# EAGLE board rangoon (EAGLE 7.5.0)
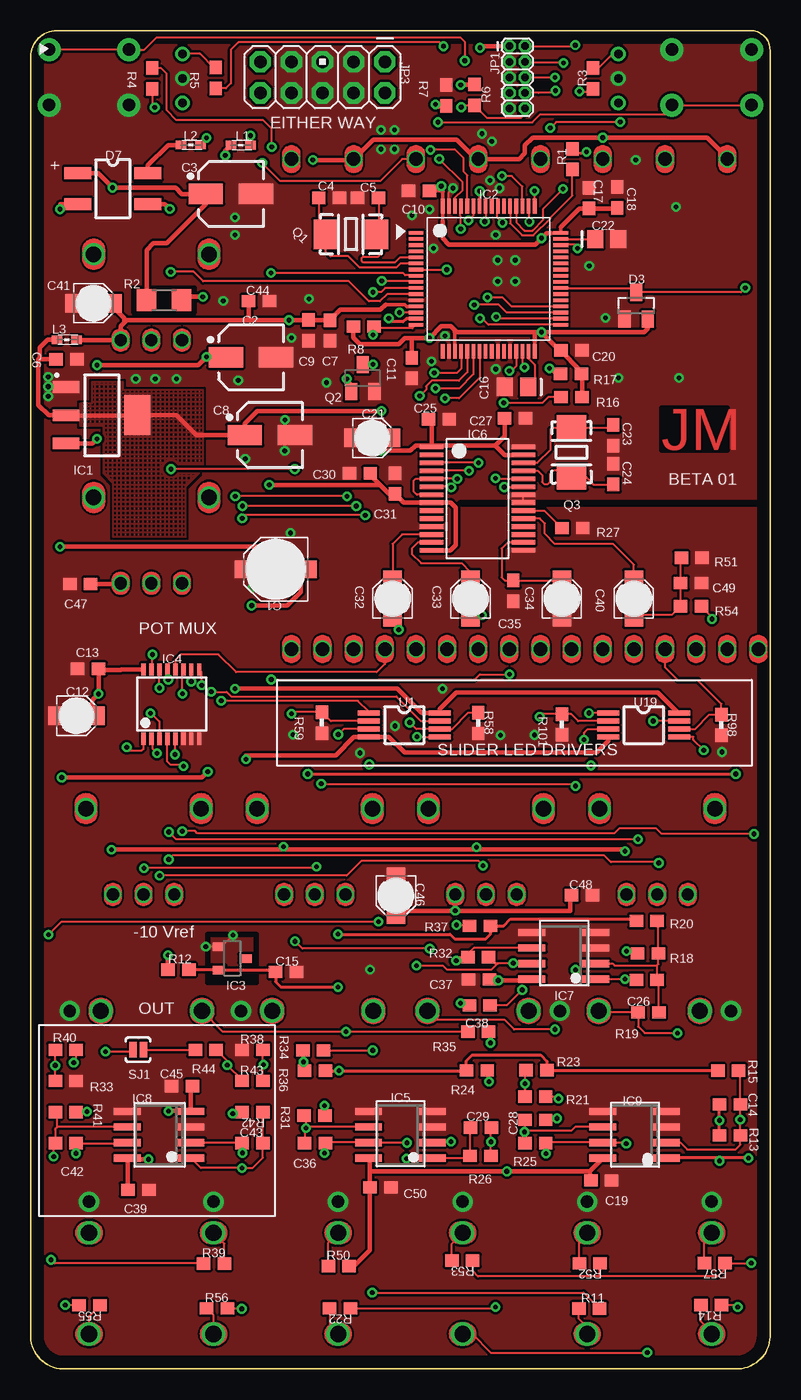
[diagram p0: board, top side]
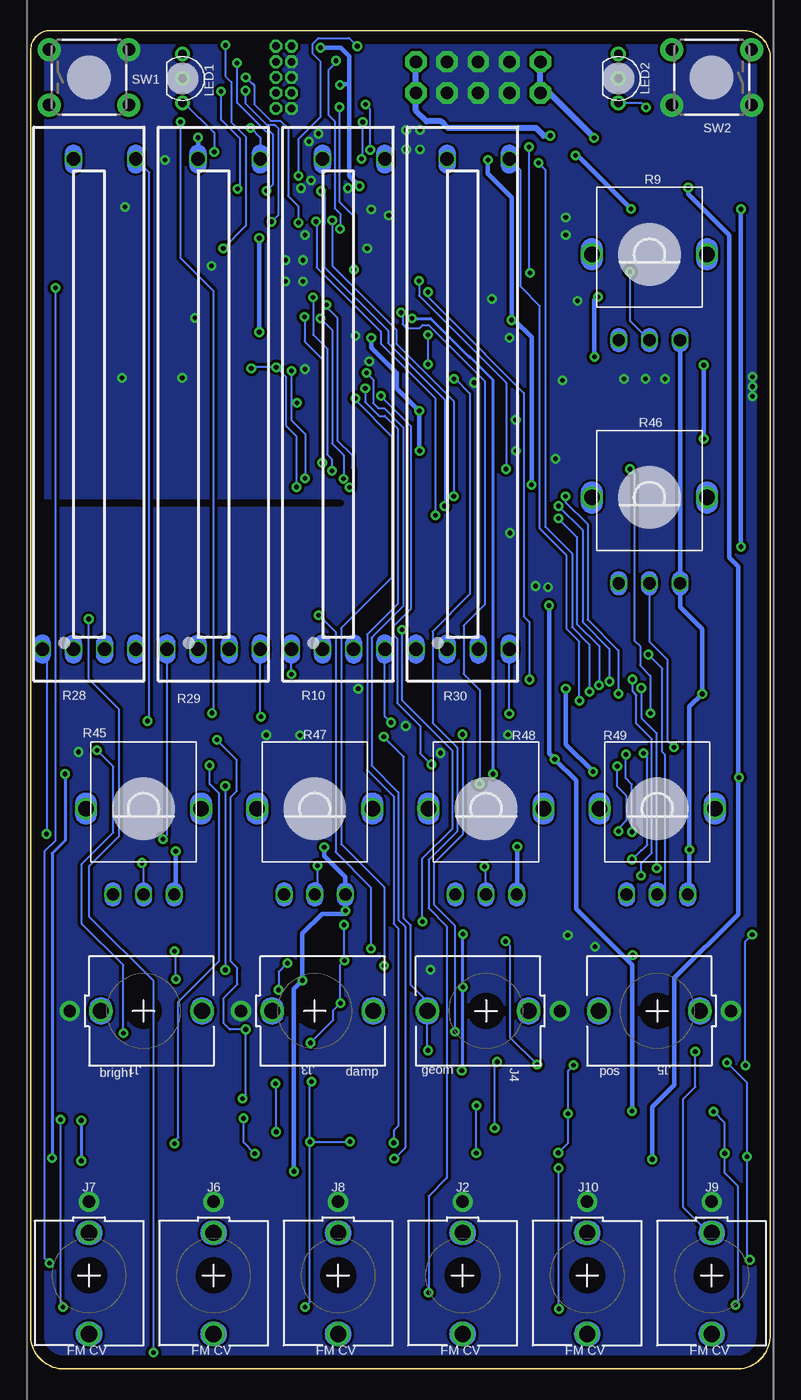
[diagram p1: board, bottom side, seen from below]

Size 60.33 x 109.22 mm. Coordinates in mm from the lower left corner, seen from the top.
Outline: 57.79,0 arc90 60.33,2.86 60.33,107.64 arc90 58.74,109.22 1.91,109.22 arc74 0,107.32 0,2.86 arc97 2.86,0 57.79,0
Copper layers (1*16): Top 0.035mm / dielectric 1.5mm / Bottom 0.035mm
Design rules "default *": minimum track width 10mil, minimum drill 0.61mm, track to track 8mil, track to pad 8mil, pad to pad 8mil, via to via 8mil, smd to smd 8mil, copper to edge 40mil, drill to drill 8mil, minimum pad ring 0mil, minimum via ring 8mil, stop-mask expansion 4mil, vias tented up to drill 15mil, thermal gap 10mil
Net classes: 0 default: width 0.178 mm, clearance 0.152 mm, clearance 0.152 mm to class 1, clearance 0.152 mm to class 2; 1 hipriority: width 0.254 mm, clearance 0.152 mm, clearance 0.152 mm to class 0, clearance 0.152 mm to class 2; 2 powa: width 0.381 mm, clearance 0.152 mm, clearance 0.152 mm to class 0, clearance 0.152 mm to class 1
tRestrict: 1 lines
bRestrict: 1 lines

## Footprints (pad centres in the part's own frame; a part is rotated, then mirrored left to right if it is on the bottom)
PANASONIC_C = smd 2.6 x 1.4: + 2.05,0; - -2.05,0
CAPAE-5.3x5.3h7 = smd 2.8 x 1.65: 1 -2.05,0; 2 2.05,0
CAP_0603 = smd 1.1 x 1: 1 -0.85,0; 2 0.85,0
CAP_0603_C5 = smd 1.1 x 1: 1 -0.85,0; 2 0.85,0
PANASONIC_A = smd 2 x 1.5: + 1.3,0; - -1.3,0
CAP_0805 = smd 1.3 x 1.5: 1 -0.95,0; 2 0.95,0
CAP_0805_C22 = smd 1.3 x 1.5: 1 -0.95,0; 2 0.95,0
SOT23 = smd 1 x 1.4: 1 -0.95,-1.1; 2 0.95,-1.1; 3 0,1.1
SOP-4/6.5x2.54 = smd 2.2 x 1: 1 -2.855,1.27; 2 -2.855,-1.27; 3 2.855,-1.27; 4 2.855,1.27
SOT223-4 = smd 2.15 x 0.95: 1 -2.9,2.3; 2 -2.9,0; 3 -2.9,-2.3 | smd 2.15 x 3.25: 4 2.9,0
TQFP-10X10-64 = smd 1.2 x 0.3: 1 -5.936,3.75; 2 -5.936,3.25; 3 -5.936,2.75; 4 -5.936,2.25; 5 -5.936,1.75; 6 -5.936,1.25; 7 -5.936,0.75; 8 -5.936,0.25; 9 -5.936,-0.25; 10 -5.936,-0.75; 11 -5.936,-1.25; 12 -5.936,-1.75; 13 -5.936,-2.25; 14 -5.936,-2.75; 15 -5.936,-3.25; 16 -5.936,-3.75; 33 5.886,-3.75; 34 5.886,-3.25; 35 5.886,-2.75; 36 5.886,-2.25; 37 5.886,-1.75; 38 5.886,-1.25; 39 5.886,-0.75; 40 5.886,-0.25; 41 5.886,0.25; 42 5.886,0.75; 43 5.886,1.25; 44 5.886,1.75; 45 5.886,2.25; 46 5.886,2.75; 47 5.886,3.25; 48 5.886,3.75 | smd 0.3 x 1.2: 17 -3.75,-5.911; 18 -3.25,-5.911; 19 -2.75,-5.911; 20 -2.25,-5.911; 21 -1.75,-5.911; 22 -1.25,-5.911; 23 -0.75,-5.911; 24 -0.25,-5.911; 25 0.25,-5.911; 26 0.75,-5.911; 27 1.25,-5.911; 28 1.75,-5.911; 29 2.25,-5.911; 30 2.75,-5.911; 31 3.25,-5.911; 32 3.75,-5.911; 49 3.75,5.936; 50 3.25,5.936; 51 2.75,5.936; 52 2.25,5.936; 53 1.75,5.936; 54 1.25,5.936; 55 0.75,5.936; 56 0.25,5.936; 57 -0.25,5.936; 58 -0.75,5.936; 59 -1.25,5.936; 60 -1.75,5.936; 61 -2.25,5.936; 62 -2.75,5.936; 63 -3.25,5.936; 64 -3.75,5.936
DBZ_R-PDSO-G3 = smd 0.7 x 1: 1 -0.95,-1.1; 2 0.95,-1.1; 3 0,1.1
TSSOP16 = smd 0.35 x 1: 1 -1.95,-2.825; 2 -1.3,-2.825; 3 -0.65,-2.825; 4 0,-2.825; 5 0.65,-2.825; 6 1.3,-2.825; 7 1.95,-2.825; 8 2.6,-2.825; 9 2.6,2.825; 10 1.95,2.825; 11 1.3,2.825; 12 0.65,2.825; 13 0,2.825; 14 -0.65,2.825; 15 -1.3,2.825; 16 -1.95,2.825
SO08 = smd 0.6 x 2.2: 1 -1.905,-2.6; 2 -0.635,-2.6; 3 0.635,-2.6; 4 1.905,-2.6; 5 1.905,2.6; 6 0.635,2.6; 7 -0.635,2.6; 8 -1.905,2.6
SSOP28 = smd 0.381 x 1.905: 1 -4.55,-3.752; 2 -3.9,-3.752; 3 -3.25,-3.752; 4 -2.6,-3.752; 5 -1.95,-3.752; 6 -1.3,-3.752; 7 -0.65,-3.752; 8 0,-3.752; 9 0.65,-3.752; 10 1.3,-3.752; 11 1.95,-3.752; 12 2.6,-3.752; 13 3.25,-3.752; 14 3.9,-3.752; 15 3.9,3.752; 16 3.25,3.752; 17 2.6,3.752; 18 1.95,3.752; 19 1.3,3.752; 20 0.65,3.752; 21 0,3.752; 22 -0.65,3.752; 23 -1.3,3.752; 24 -1.95,3.752; 25 -2.6,3.752; 26 -3.25,3.752; 27 -3.9,3.752; 28 -4.55,3.752
SO08_IC7 = smd 0.6 x 2.2: 1 -1.905,-2.6; 2 -0.635,-2.6; 3 0.635,-2.6; 4 1.905,-2.6; 5 1.905,2.6; 6 0.635,2.6; 7 -0.635,2.6; 8 -1.905,2.6
SO08_IC8 = smd 0.6 x 2.2: 1 -1.905,-2.6; 2 -0.635,-2.6; 3 0.635,-2.6; 4 1.905,-2.6; 5 1.905,2.6; 6 0.635,2.6; 7 -0.635,2.6; 8 -1.905,2.6
Thonkiconn = drill 1.321 pad 1.905: 1 0,3.48; 2 0,-4.775 | drill 1.016 pad 1.651: 3 0,6.02
Thonkiconn_J2 = drill 1.321 pad 1.905: 1 0,3.48; 2 0,-4.775 | drill 1.016 pad 1.651: 3 0,6.02
Thonkiconn_J3 = drill 1.321 pad 1.905: 1 0,3.48; 2 0,-4.775 | drill 1.016 pad 1.651: 3 0,6.02
Thonkiconn_J4 = drill 1.321 pad 1.905: 1 0,3.48; 2 0,-4.775 | drill 1.016 pad 1.651: 3 0,6.02
Thonkiconn_J5 = drill 1.321 pad 1.905: 1 0,3.48; 2 0,-4.775 | drill 1.016 pad 1.651: 3 0,6.02
2X5-1.27 = drill 0.61 pad 1.033 octagon: 1 -1.27,3.81; 2 0,3.81; 3 -1.27,2.54; 4 0,2.54; 5 -1.27,1.27; 6 0,1.27; 7 -1.27,0; 8 0,0; 9 -1.27,-1.27; 10 0,-1.27
AVR_ICSP = drill 1.016 pad 1.737 octagon: 1 -1.27,5.08; 2 1.27,5.08; 3 -1.27,2.54; 4 1.27,2.54; 5 -1.27,0; 6 1.27,0; 7 -1.27,-2.54; 8 1.27,-2.54; 9 -1.27,-5.08; 10 1.27,-5.08
0603 = smd 0.85 x 0.7: 1 -0.9,0; 2 0.7,0
LED-BICOLOR-THROUGHHOLE = drill 0.7 pad 1.208: 1 -2,0; 2 0,0; 3 2,0
TSC_7A_crystal = smd 2 x 2.4: 1 2.036,0; 2 -2.035,0
SOT23-BEC = smd 1 x 1.4: B -0.95,-1.1; C 0,1.1; E 0.95,-1.1
TSC_7A_crystal_Q3 = smd 2 x 2.4: 1 2.036,0; 2 -2.035,0
RES_0603 = smd 1.1 x 1: 1 -0.85,0; 2 0.85,0
R1206 = smd 1.6 x 1.803: 1 -1.422,0; 2 1.422,0
ALPS_POT_VERTICAL_PS = drill 1 pad 1.372: P$1 -2.5,7; P$2 0,7; P$3 2.5,7 | drill 1.27 pad 1.778: P$4 -4.7,0; P$5 4.7,0
BOURNS_PTL_30mm = drill 1.092 pad 1.397: 1 -20,1.27; 2 -20,3.81; 3 20,1.27; 4 -20,-1.27; 5 20,-3.81; 6 -20,-3.81
BOURNS_PTL_30mm_R28 = drill 1.092 pad 1.397: 1 -20,1.27; 2 -20,3.81; 3 20,1.27; 4 -20,-1.27; 5 20,-3.81; 6 -20,-3.81
BOURNS_PTL_30mm_R30 = drill 1.092 pad 1.397: 1 -20,1.27; 2 -20,3.81; 3 20,1.27; 4 -20,-1.27; 5 20,-3.81; 6 -20,-3.81
ALPS_POT_VERTICAL_PS_R45 = drill 1 pad 1.372: P$1 -2.5,7; P$2 0,7; P$3 2.5,7 | drill 1.27 pad 1.778: P$4 -4.7,0; P$5 4.7,0
ALPS_POT_VERTICAL_PS_R48 = drill 1 pad 1.372: P$1 -2.5,7; P$2 0,7; P$3 2.5,7 | drill 1.27 pad 1.778: P$4 -4.7,0; P$5 4.7,0
ALPS_POT_VERTICAL_PS_R49 = drill 1 pad 1.372: P$1 -2.5,7; P$2 0,7; P$3 2.5,7 | drill 1.27 pad 1.778: P$4 -4.7,0; P$5 4.7,0
RES_0603_R58 = smd 1.1 x 1: 1 -0.85,0; 2 0.85,0
SJ_2S-NOTRACE = smd 0.635 x 1.27: 1 -0.45,0; 2 0.4,0
TACTILE-PTH = drill 1.016 pad 1.88: 1 -3.251,2.261; 2 3.251,2.261; 3 -3.251,-2.261; 4 3.251,-2.261
TACTILE-PTH_SW2 = drill 1.016 pad 1.88: 1 -3.251,2.261; 2 3.251,2.261; 3 -3.251,-2.261; 4 3.251,-2.261
TSSOP-8 = smd 1.8 x 0.4: 1 -2.9,0.975; 2 -2.9,0.325; 3 -2.9,-0.325; 4 -2.9,-0.975; 5 2.9,-0.975; 6 2.9,-0.325; 7 2.9,0.325; 8 2.9,0.975

## Placement (x,y rotation side)
C1  22u  [PANASONIC_C]  20.01,65.26 180 top
C2  47u  [CAPAE-5.3x5.3h7]  17.98,82.55 0 top
C3  47u  [CAPAE-5.3x5.3h7]  16.34,95.89 0 top
C4  18p  [CAP_0603]  24.36,95.56 180 top
C5  18p  [CAP_0603_C5]  27.53,95.56 0 top
C6  100n  [CAP_0603_C5]  2.92,82.39 0 top
C7  1u  [CAP_0603_C5]  24.43,84.74 270 top
C8  47u  [CAPAE-5.3x5.3h7]  19.52,76.2 0 top
C9  100n  [CAP_0603_C5]  22.66,84.75 270 top
C10  100n  [CAP_0603_C5]  31.68,96.14 180 top
C11  100n  [CAP_0603_C5]  31.09,81.68 270 top
C12  10u  [PANASONIC_A]  3.73,53.31 0 top
C13  100n  [CAP_0603_C5]  4.69,57.14 180 top
C14  2.2n  [CAP_0603_C5]  57.05,21.59 180 top
C15  100n  [CAP_0603_C5]  20.83,32.4 0 top
C16  2.2u  [CAP_0805]  39.64,80.14 180 top
C17  100n  [CAP_0603_C5]  45.55,95.55 90 top
C18  1u  [CAP_0603]  47.87,95.6 90 top
C19  100n  [CAP_0603_C5]  46.55,15.38 0 top
C20  100n  [CAP_0603_C5]  44.12,83.12 0 top
C21  10u  [PANASONIC_A]  27.87,75.98 0 top
C22  2.2u  [CAP_0805_C22]  47,92.2 0 top
C23  18p  [CAP_0603]  47.53,76.2 90 top
C24  18p  [CAP_0603_C5]  47.53,73.03 270 top
C25  100n  [CAP_0603_C5]  33.3,77.49 0 top
C26  10n  [CAP_0603_C5]  50.27,31.75 180 top
C27  100n  [CAP_0603_C5]  39.51,77.59 0 top
C28  10n  [CAP_0603_C5]  41.18,20.32 0 top
C29  2.2n  [CAP_0603]  36.73,19.69 180 top
C30  1u  [CAP_0603_C5]  26.86,73.1 180 top
C31  100n  [CAP_0603_C5]  29.73,72.26 90 top
C32  10u  [PANASONIC_A]  29.53,62.87 90 top
C33  10u  [PANASONIC_A]  35.88,62.87 90 top
C34  10u  [PANASONIC_A]  43.34,62.87 90 top
C35  100n  [CAP_0603_C5]  39.37,63.5 270 top
C36  10n  [CAP_0603_C5]  23.19,18.42 0 top
C37  100n  [CAP_0603_C5]  36.58,31.79 180 top
C38  10n  [CAP_0603_C5]  36.64,29.67 0 top
C39  100n  [CAP_0603_C5]  8.79,14.61 0 top
C40  10u  [PANASONIC_A]  49.22,62.87 90 top
C41  10u  [PANASONIC_A]  5.13,86.97 0 top
C42  18p  [CAP_0603_C5]  2.86,18.42 0 top
C43  18p  [CAP_0603_C5]  18.1,18.42 0 top
C44  100n  [CAP_0603_C5]  18.64,87.15 0 top
C45  100n  [CAP_0603_C5]  12.35,23.07 0 top
C46  10u  [PANASONIC_A]  29.8,38.62 270 top
C47  100n  [CAP_0603_C5]  4.05,64.06 180 top
C48  100n  [CAP_0603_C5]  44.98,38.66 0 top
C49  220p  [CAP_0603_C5]  53.88,64.14 0 top
C50  100n  [CAP_0603_C5]  28.54,14.83 0 top
D3  BAT54S  [SOT23]  49.4,86.76 0 top
D7  MB1S  [SOP-4/6.5x2.54]  6.71,96.32 0 top
IC1  LM1117-3.3  [SOT223-4]  5.8,77.83 0 top
IC2  STM32F405RGT6  [TQFP-10X10-64]  37.37,88.96 0 top
IC3  LM4040B10  [DBZ_R-PDSO-G3]  16.44,33.5 270 top
IC4  4051PW  [TSSOP16]  11.16,54.26 0 top
IC5  MCP6002  [SO08]  30.17,19.11 90 top
IC6  WM8731  [SSOP28]  36.46,70.7 270 top
IC7  MCP6002  [SO08_IC7]  43.5,33.72 90 top
IC8  TL072  [SO08_IC8]  10.48,19.11 90 top
IC9  MCP6002  [SO08]  49.28,19.11 90 top
J1  PJ301_THONKICONN6  [Thonkiconn]  51.12,29.21 90 bottom
J2  PJ301_THONKICONN6  [Thonkiconn_J2]  25.09,7.62 0 bottom
J3  PJ301_THONKICONN6  [Thonkiconn_J3]  37.15,29.21 90 bottom
J4  PJ301_THONKICONN6  [Thonkiconn_J4]  23.18,29.21 270 bottom
J5  PJ301_THONKICONN6  [Thonkiconn_J5]  9.21,29.21 270 bottom
J6  PJ301_THONKICONN6  [Thonkiconn_J2]  45.41,7.62 0 bottom
J7  PJ301_THONKICONN6  [Thonkiconn_J2]  55.57,7.62 0 bottom
J8  PJ301_THONKICONN6  [Thonkiconn_J2]  35.25,7.62 0 bottom
J9  PJ301_THONKICONN6  [Thonkiconn_J2]  4.77,7.62 0 bottom
J10  PJ301_THONKICONN6  [Thonkiconn_J2]  14.93,7.62 0 bottom
JP1  M05X2MINIJTAG  [2X5-1.27]  40.33,104.14 0 top
JP3  M05X2PTH  [AVR_ICSP]  23.82,105.41 270 top
L1  WE-CBF_0603  [0603]  17.24,99.87 0 top
L2  WE-CBF_0603  [0603]  13.17,99.89 0 top
L3  WE-CBF_0603  [0603]  3.05,84 0 top
LED1  WP115VEGW  [LED-BICOLOR-THROUGHHOLE]  47.95,105.32 270 bottom
LED2  WP115VEGW  [LED-BICOLOR-THROUGHHOLE]  12.39,105.32 270 bottom
Q1  8MHz  [TSC_7A_crystal]  26.13,92.6 180 top
Q2  MMBT3904  [SOT23-BEC]  27.1,80.85 0 top
Q3  12.288MHz  [TSC_7A_crystal_Q3]  44.14,74.8 90 top
R1  180  [RES_0603]  44.2,98.73 90 top
R2  4.7  [R1206]  10.89,87.23 180 top
R3  180  [RES_0603]  45.88,105.31 90 top
R4  180  [RES_0603]  9.93,105.31 270 top
R5  180  [RES_0603]  15.1,105.35 90 top
R6  10k  [RES_0603]  36.22,103.97 90 top
R7  10k  [RES_0603]  33.9,103.92 270 top
R8  10k  [RES_0603]  27.18,85.06 180 top
R9  10kB  [ALPS_POT_VERTICAL_PS]  9.85,90.97 180 bottom
R10  BOURNS PTL LED SLIDE POT  [BOURNS_PTL_30mm]  35.25,78.74 90 bottom
R11  100k  [RES_0603]  45.57,4.91 0 top
R12  2.2k  [RES_0603]  12.06,32.59 0 top
R13  47k  [RES_0603]  57.05,19.05 0 top
R14  100k  [RES_0603]  55.53,5.2 180 top
R15  180k  [RES_0603]  56.92,24.33 180 top
R16  2.2k  [RES_0603]  44.13,79.31 0 top
R17  2.2k  [RES_0603]  44.08,81.2 0 top
R18  20k  [RES_0603]  50.36,33.92 0 top
R19  100k  [RES_0603]  50.41,29.1 180 top
R20  120k  [RES_0603]  50.26,36.57 180 top
R21  100k  [RES_0603]  41.18,22.23 0 top
R22  100k  [RES_0603]  25.23,4.94 180 top
R23  120k  [RES_0603]  41.27,24.38 0 top
R24  120k  [RES_0603]  36.4,24.37 180 top
R25  20k  [RES_0603]  41.18,18.42 180 top
R26  20k  [RES_0603]  36.7,17.39 0 top
R27  36k  [RES_0603]  44.19,68.62 0 top
R28  BOURNS PTL LED SLIDE POT  [BOURNS_PTL_30mm_R28]  55.57,78.74 90 bottom
R29  BOURNS PTL LED SLIDE POT  [BOURNS_PTL_30mm]  45.41,78.74 90 bottom
R30  BOURNS PTL LED SLIDE POT  [BOURNS_PTL_30mm_R30]  25.09,78.74 90 bottom
R31  20k  [RES_0603]  23.17,20.66 180 top
R32  20k  [RES_0603]  36.52,33.61 180 top
R33  47k  [RES_0603]  2.86,23.5 180 top
R34  100k  [RES_0603]  23.06,26 0 top
R35  100k  [RES_0603]  36.52,27.52 180 top
R36  120k  [RES_0603]  23.2,24.34 0 top
R37  120k  [RES_0603]  36.67,36.16 0 top
R38  47k  [RES_0603]  18.1,26.04 0 top
R39  47k  [RES_0603]  14.96,8.6 0 top
R40  6.8k  [RES_0603]  2.86,26.04 180 top
R41  47k  [RES_0603]  2.86,20.96 180 top
R42  47k  [RES_0603]  18.1,20.96 180 top
R43  6.8k  [RES_0603]  18.1,23.5 0 top
R44  47k  [RES_0603]  14.29,26.04 180 top
R45  10kB  [ALPS_POT_VERTICAL_PS_R45]  51.12,45.72 180 bottom
R46  10kB  [ALPS_POT_VERTICAL_PS]  9.85,71.12 180 bottom
R47  10kB  [ALPS_POT_VERTICAL_PS]  37.15,45.72 180 bottom
R48  10kB  [ALPS_POT_VERTICAL_PS_R48]  23.18,45.72 180 bottom
R49  10kB  [ALPS_POT_VERTICAL_PS_R49]  9.21,45.72 180 bottom
R50  3.3M  [RES_0603]  25.14,8.4 0 top
R51  6.8k  [RES_0603]  53.94,66.2 180 top
R52  100k  [RES_0603]  45.61,8.61 180 top
R53  1M  [RES_0603]  35.21,8.84 180 top
R54  36k  [RES_0603]  53.88,62.23 0 top
R55  1.0k  [RES_0603]  4.8,5.19 180 top
R56  1.0k  [RES_0603]  15.2,4.95 0 top
R57  470k  [RES_0603]  55.81,8.63 180 top
R58  1.0k  [RES_0603_R58]  36.52,52.71 270 top
R59  1.0k  [RES_0603_R58]  23.76,52.75 270 top
R98  1.0k  [RES_0603_R58]  56.36,52.55 270 top
R101  1.0k  [RES_0603_R58]  43.34,52.59 270 top
SJ1  SOLDERJUMPERNC2  [SJ_2S-NOTRACE]  8.76,26.04 180 top
SW1  TAC_SWITCHPTH  [TACTILE-PTH]  55.57,105.41 0 bottom
SW2  TAC_SWITCHPTH  [TACTILE-PTH_SW2]  4.77,105.41 180 bottom
U1  TLV2172  [TSSOP-8]  30.48,52.55 0 top
U19  TLV2172  [TSSOP-8]  50.01,52.55 0 top

## Library data of the parts
C1-C50 D3 D7 IC1-IC9 J1-J10 JP1 JP3 L1-L3 LED1 LED2 Q1-Q3 R1-R9 R11-R27 R31-R59 R98 R101 SJ1 SW1 SW2 = common
R10 R28-R30 = common; DATASHEET: http://www.bourns.com/data/global/pdfs/bourns_trimpot_catalog.pdf; MANUFACTURER: Bourns
U1 U19 = common; DATASHEET: http://datasheets.diptrace.com\ti\TL07x.pdf

## Nets
+3V3 [powa]: C6.1 C8.1 C10.1 C11.1 C17.1 C18.1 C20.1 C21.+ C25.1 C27.1 D3.2 IC1.2 IC1.4 IC2.19 IC2.32 IC2.48 IC2.64 IC6.1 IC6.27 JP1.1 L3.1 R6.2 R8.2 R16.2 R17.2
+3V3_A [powa]: C7.1 C9.1 C12.+ C13.1 C19.1 C30.1 C31.1 C37.1 C41.+ C44.1 C46.+ C47.1 C48.1 C50.1 IC2.13 IC4.16 IC5.8 IC6.8 IC6.14 IC7.8 IC9.8 L3.2 R9.P$1 R10.3 R28.3 R29.3 R30.3 R45.P$1 R46.P$1 R47.P$1 R48.P$1 R49.P$1 R50.2
AREF_-10 [hipriority]: C15.1 IC3.2 R12.2 R15.2 R20.2 R23.2 R24.2 R36.2 R37.2
AUX_OUT: C33.+ IC6.13
BOOT_FLASH: IC2.60 R7.2
BRI-raw: J1.2 R19.2 U19.5
BRIGHTNESS_ATT: IC4.2 R45.P$2
BRIGHTNESS_CV: C26.2 IC2.14 IC7.1 R18.1
BRIGHTNESS_POT: IC4.4 R28.2
CV_NORMALIZATION: J7.1 R57.2
DAMP-raw: J3.2 R21.2 U19.3
DAMP_ATT: IC4.13 R47.P$2
DAMP_CV: C28.2 IC2.21 IC9.7 R25.1
DAMP_POT: IC4.5 R29.2
FM_CV: C29.2 IC2.20 IC5.1 R26.1
FREQUENCY_ATT: IC4.1 R46.P$2
FREQUENCY_POT: IC2.11 R9.P$2
GEOM-raw: J4.2 R34.2 U1.5
GEOMETRY_ATT: IC4.14 R48.P$2
GEOMETRY_CV: C36.2 IC2.22 IC5.7 R31.1
GEOMETRY_POT: IC2.10 R10.2
GND: C1.+ C2.2 C3.2 C4.1 C5.1 C6.2 C7.2 C8.2 C9.2 C10.2 C11.2 C12.- C13.2 C15.2 C16.2 C17.2 C18.2 C19.2 C20.2 C21.- C22.2 C23.1 C24.1 C25.2 C27.2 C30.2 C31.2 C34.- C35.2 C37.2 C39.2 C41.- C44.2 C45.1 C46.- C47.2 C48.2 C49.2 C50.2 D3.1 IC1.1 IC2.12 IC2.18 IC2.26 IC2.28 IC2.63 IC3.1 IC4.6 IC4.7 IC4.8 IC5.3 IC5.4 IC5.5 IC6.11 IC6.15 IC6.21 IC6.22 IC6.28 IC7.3 IC7.4 IC7.5 IC8.3 IC8.5 IC9.3 IC9.4 IC9.5 J1.3 J2.3 J3.3 J4.3 J5.3 J6.3 J7.3 J8.3 J9.3 J10.3 JP1.3 JP1.5 JP1.9 JP3.3 JP3.4 JP3.5 JP3.6 JP3.7 JP3.8 LED1.2 LED2.2 Q2.E R7.1 R9.P$3 R9.P$4 R9.P$5 R10.1 R27.2 R28.1 R29.1 R30.1 R33.1 R38.1 R45.P$3 R45.P$4 R45.P$5 R46.P$3 R46.P$4 R46.P$5 R47.P$3 R47.P$4 R47.P$5 R48.P$3 R48.P$4 R48.P$5 R49.P$3 R49.P$4 R49.P$5 R51.1 R58.2 R59.2 R98.2 R101.2 SW1.1 SW1.2 SW2.1 SW2.2
I2C_SCL: IC2.29 IC6.24 R16.1
I2C_SDA: IC2.30 IC6.23 R17.1
I2S_LRCK: IC2.33 IC6.5 IC6.7
I2S_SCK: IC2.34 IC6.3
I2S_SIN: IC2.35 IC6.6
I2S_SOUT: IC2.36 IC6.4
IN_1: IC6.20 R27.1
IN_2: C40.+ IC6.19
JTCK: IC2.49 JP1.4
JTDI: IC2.50 JP1.8
JTDO: IC2.55 JP1.6
JTMS: IC2.46 JP1.2
MAIN_OUT: C32.+ IC6.12
MUX_ADDR_0: IC2.59 IC4.11
MUX_ADDR_1: IC2.58 IC4.10
MUX_ADDR_2: IC2.57 IC4.9
MUXED_POTS: IC2.9 IC4.3
N$2: C26.1 IC7.2 R18.2 R19.1 R20.1
N$3: J7.2 R14.2
N$4: J2.2 R22.2
N$5: C29.1 IC5.2 R22.1 R24.1 R26.2
N$7: C5.2 IC2.5 Q1.2
N$8: C4.2 IC2.6 Q1.1
N$9: J6.2 R11.1
N$11: C28.1 IC9.6 R21.1 R23.1 R25.2
N$12: LED1.3 R1.2
N$13: C22.1 IC2.47
N$14: C14.1 IC9.2 R13.2 R14.1 R15.1
N$15: C36.1 IC5.6 R31.2 R34.1 R36.1
N$16 [powa]: C2.1 IC1.3 R2.1
N$17: C34.+ C35.1 IC6.16
N$18: C40.- C49.1 R51.2 R54.1
N$19: C16.1 IC2.31
N$20: J6.1 R52.2
N$21: J8.2 R54.2
N$22: LED1.1 R3.2
N$23: C33.- R38.2 R43.2
N$25: C43.1 IC8.2 R42.2 R43.1 R44.1
N$27: LED2.3 R4.2
N$28: C43.2 IC8.1 R42.1 R56.2
N$29: J10.2 R56.1
N$30: C38.1 IC7.6 R32.2 R35.1 R37.1
N$31: C32.- R33.2 R40.2
N$32: C42.1 IC8.6 R39.1 R40.1 R41.2
N$33: C42.2 IC8.7 R41.1 R55.2
N$34: J9.2 R55.1
N$35: LED2.1 R5.2
N$37: IC2.52 R3.1
N$38: J2.1 R50.1
N$39: J8.1 R53.2
N$40: IC2.8 R4.1
N$41: C24.2 IC6.25 Q3.2
N$42: C23.2 IC6.26 Q3.1
N$43: IC2.53 R1.1
N$44: IC2.51 R5.1
N$45: J10.1 R39.2
N$46: R44.2 SJ1.1
N$47: J9.1 SJ1.2
N$56: JP3.1 JP3.2 L1.2
N$64: JP3.9 JP3.10 L2.2
N$66: Q2.B R11.2
Net_0: R30.6 R59.1 U1.2
Net_1: R10.6 R58.1 U1.6
Net_95 [powa]: D7.3 L1.1
Net_96 [powa]: D7.4 L2.1
Net_103: R30.5 U1.1
Net_104: R29.5 U19.1
Net_105: R28.5 U19.7
Net_106: R10.5 U1.7
Net_109: R29.6 R101.1 U19.2
Net_116: R28.6 R98.1 U19.6
NORMALIZATION_PROBE: D3.3 IC2.39 R52.1 R53.1 R57.1
POS-raw: J5.2 R35.2 U1.3
POSITION_ATT: IC4.15 R49.P$2
POSITION_CV: C38.2 IC2.23 IC7.7 R32.1
POSITION_POT: IC4.12 R30.2
RESET: IC2.7 JP1.10 R6.1
STRUM: IC2.16 Q2.C R8.1
SW_MODE: IC2.61 SW2.3 SW2.4
SW_POLYPHONY: IC2.62 SW1.3 SW1.4
V_OCT_CV [hipriority]: C14.2 IC2.15 IC9.1 R13.1
VCC [powa]: C3.1 C39.1 D7.1 IC8.8 R2.2 U1.8 U19.8
VEE [powa]: C1.- C45.2 D7.2 IC8.4 R12.1 U1.4 U19.4

## Tracks (layer width: path | path; a pad name or v marks a point on that pad's centre or on a via)
+3V3  (via drill 0.38 pad 0.7)
  Top 0.3: IC2.32 41.12,83.84 | 34.62,84.62 IC2.19 | 42.47,92.71 IC2.48 43.26,93.19 | 33.62,93.67 IC2.64 33.62,96.08
  Top 0.381: IC1.4 11.86,77.83 13.49,76.2 C8.1 17.47,77.16 18.48,78.18 v28.62,78.18 | IC1.2 2.9,77.79 | 2.9,77.79 8.7,77.79 | 8.7,77.79 IC1.4 | 41.12,83.84 41.12,84.62 | 41.12,84.62 34.77,84.62 | 34.77,84.62 34.62,84.62 | 42.47,92.71 42.1,92.71 v41.67,92.29 41.15,91.76 34.13,91.76 33.62,92.27 33.62,93.67 | 33.62,96.08 33.5,96.21 | 33.5,96.21 v33.5,96.52 | v36.67,107.83 36.8,107.95 JP1.1 | 41.12,84.62 v41.67,84.62 | 34.77,84.62 34.29,85.09 33.5,85.09 v32.55,84.14 31.14,84.14 | 31.14,84.14 30.53,84.14 30.02,83.63 26.87,83.63 26.33,84.17 R8.2 | IC6.27 38.67,74.6 37.9,75.37 | 37.9,75.37 32.83,75.37 IC6.1 | IC6.1 32.71,75.36 31.4,75.36 30.96,74.93 v28.58,74.93 28.58,75.57 29.58,75.57 C21.+ | IC6.1 32.71,77.24 C25.1 | C27.1 38.66,76.13 37.9,75.37 | R16.2 44.98,81.14 R17.2 44.93,81.4 44.04,82.29 44.04,82.34 C20.1 43.17,83.12 v41.67,84.62 | 43.26,93.19 44.77,94.7 C17.1 47.81,94.7 C18.1 | C11.1 31.09,84.09 31.14,84.14 | L3.1 1.38,84 0.74,83.35 0.74,82.39 | 0.74,82.39 0.64,82.39 0.64,78.66 1.47,77.83 IC1.2 | v41.67,84.62 50.07,84.62 50.35,84.9 D3.2 | IC1.2 2.9,77.79 | 2.9,77.79 8.7,77.79 | 8.7,77.79 IC1.4 | C10.1 33.5,96.21 | R6.2 35.12,104.82 v35.09,104.78 | C6.1 0.74,82.39
  Bottom 0.381: v33.5,96.52 34.34,97.36 34.34,104.83 | 34.34,104.83 34.34,107.13 35.04,107.83 v36.67,107.83 | v41.67,84.62 v41.67,92.29 | v28.58,74.93 28.62,74.93 v28.62,78.18 30.46,80.01 30.46,81.27 32.55,83.36 v32.55,84.14 | v35.09,104.78 35.04,104.83 34.34,104.83
  pour Top (isolate 0.178, hatched): 4.06,78.81 5.01,78.81 5.01,80.56 7.53,80.56 7.53,79.92 14.04,79.92 14.04,73.38 12.61,71.95 12.61,67.88 6.76,67.88 6.76,72.27 5.97,73.06 5.97,76.93 4.06,76.93
+3V3_A  (via drill 0.38 pad 0.7)
  Top 0.3: IC2.13 30.68,86.71 30.52,86.87 28.96,86.87
  Top 0.35: IC4.16 8.84,57.09
  Top 0.381: R28.3 56.84,98.87 55.22,100.48 v46.68,100.48 40.95,100.48 40.33,99.86 40.33,99.22 39.85,98.74 R10.3 36.36,98.74 34.77,100.33 27.94,100.33 R30.3 26.28,98.66 v23.02,98.66 | 28.96,86.87 28.52,86.44 25.28,86.44 C7.1 22.67,85.59 C9.1 v21.09,85.6 17.81,85.6 | 17.81,85.6 7.85,85.6 7.63,85.38 | 7.63,85.38 7.63,85.77 C41.+ | IC6.14 34.25,66.8 34.66,67.22 34.66,70.3 34.26,70.7 IC6.8 30.44,70.7 C31.1 29.27,71.41 28.52,72.15 | 8.84,57.09 7.4,57.09 7.35,57.04 5.64,57.04 C13.1 v5.54,55.09 5.03,54.58 C12.+ | 17.81,85.6 17.81,87.12 C44.1 | 28.52,72.15 27.71,72.96 C30.1 | 27.69,16.12 C50.1 27.69,9.68 26.41,8.4 R50.2 | 27.69,16.12 27.69,17.09 IC5.8 | 27.69,16.12 v38.85,16.12 45.63,16.12 | 45.63,16.12 46.68,17.17 IC9.8 | C48.1 44.03,38.56 44.03,37.4 v34.64,37.4 29.87,37.4 C46.+ | C19.1 45.63,16.12 | IC7.8 41.01,31.7 v38.15,31.7 37.51,31.7 C37.1 | v48.5,42.25 48.37,42.38 36.38,42.38 | 36.38,42.38 20.69,42.38 | 20.69,42.38 v6.58,42.38 | C47.1 7.28,64.06 R46.P$1 | L3.2 3.78,83.97 R9.P$1 7.35,85.09 7.63,85.38 | v20.63,42.62 20.69,42.62 20.69,42.38 | v36.38,42.59 36.38,42.38 | v19.46,72.15 28.52,72.15
  Bottom 0.381: R29.3 v46.68,100.48 | v23.02,98.66 23.02,97.54 21.09,95.6 v21.09,85.6 20.87,85.6 19.46,84.19 v19.46,72.15 | v38.85,16.12 38.85,31 v38.15,31.7 38.15,35.53 36.54,37.14 34.64,37.14 v34.64,37.4 34.64,38.71 R47.P$1 34.65,40.13 36.38,41.86 v36.38,42.59 | R45.P$1 48.5,38.72 v48.5,42.25 | R49.P$1 6.58,38.85 v6.58,42.38 6.58,54.05 v5.54,55.09 5.54,60.39 7.35,62.19 R46.P$1 R9.P$1 | R48.P$1 20.63,38.72 v20.63,42.62
AREF_-10  (via drill 0.38 pad 0.7)
  Top 0.254: R36.2 v25.16,24.34 35.52,24.34 R24.2 35.55,25.16 36.02,25.63 41.6,25.63 42.12,25.11 R23.2 56.02,24.38 R15.2 | R20.2 49.27,36.72 39.14,36.72 38.58,36.16 R37.2 37.52,35.49 37.12,35.08 34.61,35.08 34.22,35.47 v25.07,35.47 | R12.2 15.3,32.59 IC3.2 19.84,32.55 C15.1 19.98,31.6 20.41,31.17 v25.07,31.17
  Bottom 0.254: v25.16,24.34 25.07,24.34 v25.07,31.17 v25.07,35.47
AUX_OUT
  Top 0.178: IC6.13 31.6,67.45 31.1,66.95 31.1,66.52 31.85,65.77 35.17,65.77 35.88,65.05 C33.+
BOOT_FLASH  (via drill 0.38 pad 0.7)
  Top 0.178: IC2.60 35.62,97.42 35.32,97.71 35.32,98.83 34.66,99.49 v32.63,99.49 | v33.02,103.19 33.3,102.91 33.46,103.07 R7.2
  Bottom 0.178: v32.63,99.49 32.63,102.8 v33.02,103.19
BRI-raw  (via drill 0.38 pad 0.7)
  Top 0.178: J1.2 46.46,29.1 R19.2 49.56,27.95 50.1,27.41 v52.76,27.41 | v54.92,50.49 54.07,51.34 54.07,51.59 54.05,51.57 U19.5
  Bottom 0.178: v52.76,27.41 52.76,32.95 56.14,36.33 56.14,41.19 53.58,43.76 53.58,49.15 v54.92,50.49
BRIGHTNESS_ATT  (via drill 0.38 pad 0.7)
  Top 0.178: v51.25,41.29 51.17,41.37 47.34,41.37 46.79,41.92 11.61,41.92 v11.27,41.58 | v10.32,50.24 9.97,50.58 9.97,51.32 IC4.2
  Bottom 0.178: R45.P$2 51.12,41.16 v51.25,41.29 | v11.27,41.58 10.52,42.32 10.46,42.32 10.01,42.78 10.01,49.93 v10.32,50.24
BRIGHTNESS_CV  (via drill 0.38 pad 0.7)
  Top 0.178: IC2.14 v30.1,86.21 | v23.71,47.75 44.28,47.75 v44.46,47.58 | v44.46,32.56 45.29,31.73 45.38,31.81 IC7.1 v48.49,31.81 49.36,31.81 C26.2 | v48.6,34.09 48.78,33.92 R18.1
  Bottom 0.178: v30.1,86.21 29.98,86.09 29.98,85.25 29.68,84.96 28.59,84.96 28.35,85.2 27.86,85.2 23.27,80.61 23.27,62.4 25.01,60.66 25.01,56.73 23.71,55.43 v23.71,47.75 | v44.46,47.58 v44.46,32.56 | v48.49,31.81 48.49,33.97 v48.6,34.09
BRIGHTNESS_POT  (via drill 0.38 pad 0.7)
  Top 0.178: v59.03,43.66 51.49,43.66 51.03,44.12 48.03,44.12 47.61,43.7 13.61,43.7 13.42,43.89 v12.36,43.89 | v12.47,49.19 12.36,49.3 11.42,49.3 11.16,49.57 IC4.4
  Bottom 0.178: R28.2 59.03,58.74 v59.03,43.66 | v12.36,43.89 12.36,44.13 11.7,44.79 11.7,46.77 12.47,47.54 v12.47,49.19
CV_NORMALIZATION
  Top 0.178: R57.2 54.96,10.5 J7.1
DAMP-raw  (via drill 0.38 pad 0.7)
  Top 0.178: R21.2 42.87,22.23 v43.05,22.05 | v42.78,27.7 39.45,27.7 38.68,28.47 32.38,28.47 J3.2 | v45.14,51.34 45.17,51.37 45.17,51.93 45.47,52.22 U19.3
  Bottom 0.178: v43.05,22.05 42.78,22.33 v42.78,27.7 44.08,27.7 44.58,28.21 44.58,30.27 43.46,31.39 43.46,32.72 43.99,33.24 43.99,46.69 43.5,47.18 43.5,49.7 v45.14,51.34
DAMP_ATT  (via drill 0.38 pad 0.7)
  Top 0.178: v36.92,41.08 36.54,41.46 26.98,41.46 25.77,40.25 v10.53,40.25 | v11.23,56.26 11.23,57.02 IC4.13
  Bottom 0.178: R47.P$2 36.92,38.72 v36.92,41.08 | v10.53,40.25 10.53,41.24 9.64,42.13 9.64,51.4 10.91,52.67 10.91,54.99 11.23,55.31 v11.23,56.26
DAMP_CV  (via drill 0.38 pad 0.7)
  Top 0.178: v42.04,17.56 42.03,17.58 R25.1 42.09,18.48 IC9.7 48.5,18.48 v48.59,18.39 | v42.95,20.45 42.15,20.45 C28.2 | v45.73,49.25 27.55,49.25 v27.63,49.33 27.61,49.33 | IC2.21 35.62,81.34 34.93,80.65 32.71,80.65 32.26,80.2 32.26,79.92 v31.75,79.41
  Bottom 0.178: v42.04,17.56 42.95,18.47 v42.95,20.45 | v48.59,18.39 48.59,18.56 48.27,18.89 48.27,29.96 44.95,33.28 44.95,46.95 45.73,47.73 v45.73,49.25 | v31.75,79.41 31.77,79.41 29.33,76.97 29.33,62.01 30.76,60.57 30.76,59.93 30.42,59.59 30.42,54.36 28.55,52.48 28.55,50.25 v27.63,49.33
DAMP_POT  (via drill 0.38 pad 0.7)
  Top 0.178: v49.54,43.22 11.87,43.22 v11.27,43.82 | v11.77,50.14 11.81,50.19 IC4.5
  Bottom 0.178: R29.2 49.22,43.55 v49.54,43.22 | v11.27,43.82 11.27,47.7 11.78,48.21 11.78,50.12 v11.77,50.14
FM_CV  (via drill 0.38 pad 0.7)
  Top 0.178: IC2.20 35.12,81.64 34.77,81.28 v32.93,81.28 | v30.67,17.16 32.72,17.16 IC5.1 35.66,17.21 R26.1 35.85,19.66 C29.2
  Bottom 0.178: v32.93,81.28 32.39,80.73 32.39,78.81 31.98,78.4 31.48,78.4 29.92,76.84 29.92,62.27 32.51,59.68 32.51,49.24 30.32,47.05 30.32,36.63 29.79,36.1 29.79,18.04 v30.67,17.16
FREQUENCY_ATT  (via drill 0.38 pad 0.7)
  Top 0.178: v7.84,50.74 8.12,50.46 9.04,50.46 9.21,50.63 IC4.1
  Bottom 0.178: R46.P$2 9.85,59.35 8.38,57.88 8.38,51.27 v7.84,50.74
FREQUENCY_POT  (via drill 0.38 pad 0.7)
  Top 0.178: IC2.11 29.08,87.71 28.5,87.14 27.6,87.14 25.97,88.76 14.07,88.76 13.3,89.54 v11.43,89.54
  Bottom 0.178: v11.43,89.54 11.43,85.56 R9.P$2
GEOM-raw  (via drill 0.38 pad 0.7)
  Top 0.178: R34.2 v27.92,26 | v31.52,51.59 31.54,51.57 U1.5
  Bottom 0.178: v27.92,26 27.96,26.04 J4.2 27.96,29.98 29.31,31.33 29.31,36.2 29.89,36.78 29.89,49.95 v31.52,51.59
GEOMETRY_ATT  (via drill 0.38 pad 0.7)
  Top 0.178: v23.31,41 23.19,40.87 v9.24,40.87 | v10.51,55.58 IC4.14
  Bottom 0.178: R48.P$2 23.18,40.86 v23.31,41 | v9.24,40.87 9.24,51.86 10.48,53.1 10.48,55.54 v10.51,55.58
GEOMETRY_CV  (via drill 0.38 pad 0.7)
  Top 0.178: IC2.22 36.12,81.17 34.96,80.01 v33.03,80.01 | v30.7,18.44 27.6,18.44 IC5.7 24.1,18.48 C36.2 24.04,17.69 v23.98,17.62 | v23.96,21.49 23.96,20.72 R31.1
  Bottom 0.178: v33.03,80.01 33.03,78.91 31.89,77.76 31.44,77.76 30.4,76.73 30.4,62.43 32.89,59.94 32.89,48.89 30.73,46.73 30.73,36.35 30.34,35.96 30.34,19.82 30.7,19.46 v30.7,18.44 | v23.98,17.62 23.96,17.64 v23.96,21.49
GEOMETRY_POT  (via drill 0.38 pad 0.7)
  Top 0.178: IC2.10 28.93,88.21 28.6,87.88 v27.92,87.88 | v19.63,56.27 36.23,56.27 36.65,56.69 v39.06,56.69
  Bottom 0.178: v27.92,87.88 27.92,87.53 23.27,82.88 23.27,82.83 20.09,79.65 20.09,61.42 19.63,60.96 v19.63,56.27 | v39.06,56.69 R10.2
GND  (via drill 0.38 pad 0.7)
  Top 0.178: v14.29,34.45 v14.3,34.45 IC3.1 15.55,34.45 v16.51,35.4 | IC2.63 34.12,96.03 v34.45,96.36 | IC6.21 IC6.22
  other vias: 32.71,82.24 33.82,84.3 37.94,81.6 32.55,94.62 37.94,92.55 32.86,91.44 15.72,87.16 22.7,87.32 38.34,51.71 41.11,51.74 21.39,51.77 56.42,50.35 1.43,80.17 1.43,79.38 1.43,80.97 8.58,80.81 10.16,80.81 11.91,80.81 16.67,93.98 16.67,92.55 21.28,84.14 17.5,74.28 24.13,80.49 20.73,74.92 20.75,77.44 38.1,90.49 38.1,88.74 39.53,90.49 39.53,88.74 37.47,97 38.26,96.36 36.83,100.81 37.63,100.17 31.12,94.14 28.58,99.54 29.69,99.54 28.58,101.13 29.69,101.13 27.7,32.57 29.73,52.47 26.88,50.26 33.6,55.51 46.91,85.79 45.58,90.01 49.37,98.67 52.64,94.82 47.96,80.9 52.89,80.87 18.11,63.8 21.21,68.22 19.14,63.89 16.94,80.67
  pour Bottom (isolate 0.229, rank 2): 57.74,0.52 58.32,0.63 58.83,0.88 59.26,1.25 59.58,1.73 59.76,2.26 59.81,2.88 59.81,107.6 59.77,107.91 59.66,108.17 59.49,108.39 59.27,108.56 59.02,108.66 58.71,108.7 1.97,108.7 1.63,108.61 1.3,108.45 1.01,108.22 0.78,107.93 0.61,107.6 0.52,107.25 0.52,2.88 0.58,2.22 0.8,1.65 1.16,1.16 1.65,0.8 2.22,0.58 2.88,0.52
  pour Top (isolate 0.203, rank 2): 57.75,0.41 58.35,0.53 58.89,0.79 59.34,1.18 59.68,1.67 59.88,2.24 59.92,2.88 59.92,107.61 59.88,107.94 59.76,108.22 59.57,108.47 59.33,108.66 59.05,108.77 58.71,108.82 1.96,108.82 1.59,108.72 1.23,108.55 0.93,108.3 0.68,107.99 0.51,107.64 0.41,107.27 0.41,2.88 0.47,2.2 0.69,1.59 1.08,1.08 1.59,0.69 2.2,0.47 2.88,0.41
I2C_SCL  (via drill 0.38 pad 0.7)
  Top 0.178: IC2.29 39.62,81.85 39.21,81.44 v39.05,81.44 | v37.94,72.68 40.18,72.68 IC6.24 | R16.1 42.21,79.31 41.75,78.84 v38.6,78.84
  Bottom 0.178: v39.05,81.44 39.05,79.1 | 39.05,79.1 39.05,77.42 37.94,76.31 v37.94,72.68 | v38.6,78.84 38.6,79.04 38.99,79.04 39.05,79.1
I2C_SDA  (via drill 0.38 pad 0.7)
  Top 0.178: IC2.30 40.12,81.92 v40.29,81.75 | v38.64,71.97 40.24,71.97 IC6.23 | v42.33,81.65 42.77,81.2 R17.1
  Bottom 0.178: v38.64,71.97 38.64,76.11 39.51,76.98 39.51,80.97 v40.29,81.75 42.22,81.75 v42.33,81.65
I2S_LRCK  (via drill 0.38 pad 0.7)
  Top 0.178: IC2.33 37.35,85.21 36.83,85.73 v36.67,85.73 | v34.8,72.65 IC6.5 31.41,72.65 31.27,72.51 31.27,71.59 31.5,71.35 IC6.7
  Bottom 0.178: v36.67,85.73 35.74,84.79 35.74,75.52 34.8,74.58 v34.8,72.65
I2S_SCK  (via drill 0.38 pad 0.7)
  Top 0.178: IC2.34 38.13,85.71 v37.98,85.87 | v36.54,73.95 IC6.3
  Bottom 0.178: v37.98,85.87 37.98,83.86 36.54,82.42 v36.54,73.95
I2S_SIN  (via drill 0.38 pad 0.7)
  Top 0.178: IC2.35 38.83,86.21 38.2,86.84 v36.2,86.84 | v34.31,71.94 34.25,72 IC6.6
  Bottom 0.178: v36.2,86.84 36.2,86.68 35.31,85.79 35.31,75.77 34.1,74.56 34.1,73.55 34.02,73.47 34.02,72.23 v34.31,71.94
I2S_SOUT  (via drill 0.38 pad 0.7)
  Top 0.178: IC2.36 39.24,86.71 38.51,87.44 v37.28,87.44 | v35.75,73.3 IC6.4
  Bottom 0.178: v37.28,87.44 37.28,84.4 36.14,83.25 36.14,74.64 35.75,74.25 v35.75,73.3
IN_1
  Top 0.178: IC6.20 41.91,70.05 R27.1
IN_2
  Top 0.178: C40.+ 49.22,65.64 47.52,67.34 42.78,67.34 41.95,68.17 41.95,69 41.55,69.4 IC6.19
JTCK  (via drill 0.38 pad 0.7)
  Top 0.178: IC2.49 41.12,96.12 v41.1,96.14 | v43.48,106.58 40.43,106.58 JP1.4
  Bottom 0.178: v41.1,96.14 40.56,96.68 40.56,100.72 40.79,100.96 41.11,100.96 43.48,103.33 v43.48,106.58
JTDI  (via drill 0.38 pad 0.7)
  Top 0.178: IC2.50 40.62,93.69 v40.69,93.62 | v42.81,104.32 42.66,104.16 41.41,104.16 41.43,104.14 JP1.8
  Bottom 0.178: v40.69,93.62 40.1,94.21 40.1,101.22 40.38,101.5 41.02,101.5 42.77,103.26 42.77,104.1 42.99,104.32 v42.81,104.32
JTDO  (via drill 0.38 pad 0.7)
  Top 0.178: JP1.6 v42.78,105.41 | v38.49,93.54 38.08,93.95 38.08,94.86 IC2.55
  Bottom 0.178: v42.78,105.41 42.28,104.92 42.26,104.92 42.08,104.74 42.08,103.2 40.74,101.86 39.95,101.86 39.33,101.24 39.33,95.72 38.49,94.88 v38.49,93.54
JTMS  (via drill 0.38 pad 0.7)
  Top 0.178: JP1.2 44.35,107.95 v44.43,108.04 | v44.61,91.44 44.61,91.76 43.43,91.76 43.48,91.71 IC2.46
  Bottom 0.178: v44.43,108.04 44.43,105.5 43.96,105.02 43.96,101.74 42.76,100.55 42.76,93.29 v44.61,91.44
MAIN_OUT
  Top 0.178: IC6.12 30.3,68.1 29.53,67.33 C32.+
MUX_ADDR_0  (via drill 0.38 pad 0.7)
  Top 0.178: IC2.59 36.12,94.12 v35.72,93.72 | v25.81,71.22 v16.7,71.22 | v12.38,55.1 12.38,57 IC4.11
  Bottom 0.178: v35.72,93.72 35.72,90.04 30.52,84.84 30.52,83.68 25.81,78.97 v25.81,71.22 | v16.7,71.22 16.7,70.75 14.88,68.93 14.88,61.15 12.38,58.65 v12.38,55.1
MUX_ADDR_1  (via drill 0.38 pad 0.7)
  Top 0.178: IC2.58 36.65,94.9 v36.65,96.12 | v26.57,70.42 v17.27,70.42 | v13.11,56.1 IC4.10
  Bottom 0.178: v36.65,96.12 36.33,95.81 36.33,93.41 36.36,93.43 36.36,89.92 31.17,84.73 31.17,83.72 26.57,79.12 v26.57,70.42 | v17.27,70.42 15.3,68.44 15.3,60.96 13.11,58.77 v13.11,56.1
MUX_ADDR_2  (via drill 0.38 pad 0.7)
  Top 0.178: IC2.57 37.12,93.71 v37.05,93.64 | v27.3,69.67 17.51,69.67 v17.26,69.42 | v13.95,55.8 13.95,56.89 IC4.9
  Bottom 0.178: v37.05,93.64 36.99,93.58 36.99,89.9 31.75,84.66 31.75,83.68 27.3,79.23 v27.3,69.67 | v17.26,69.42 17.28,69.4 15.77,67.9 15.77,60.8 13.95,58.98 v13.95,55.8
MUXED_POTS  (via drill 0.38 pad 0.7)
  Top 0.178: IC2.9 31.44,88.79 v28.64,88.79 | v21.55,73.44 v11.44,73.44 | v9.77,53.5 9.86,53.5 10.51,52.85 IC4.3
  Bottom 0.178: v28.64,88.79 28.64,87.58 21.55,80.49 v21.55,73.44 | v11.44,73.44 11.07,73.07 11.07,59.46 10.61,59 10.61,57.41 9.77,56.57 v9.77,53.5
N$2
  Top 0.178: R19.1 51.26,31.61 C26.1 51.12,32.92 51.08,32.92 | R20.1 51.21,36.47 R18.2 51.21,33.05 51.08,32.92 | IC7.2 47.48,33.08 47.64,32.92 51.08,32.92
N$3
  Top 0.178: J7.2 55.57,3.01 54.68,3.89 R14.2
N$4
  Top 0.178: R22.2 24.38,3.55 J2.2
N$5  (via drill 0.38 pad 0.7)
  Top 0.178: R26.2 v37.55,18.53 37.55,19.66 C29.1 | v34.29,18.56 34.21,18.48 IC5.2 | v37.41,23.44 37.25,23.59 R24.1 | R22.1 37.82,4.94 v37.94,5.06
  Bottom 0.178: v37.55,18.53 34.32,18.53 v34.29,18.56 | v37.55,18.53 37.55,23.3 v37.41,23.44 | v37.94,5.06 37.55,5.45 v37.55,18.53
N$7
  Top 0.178: IC2.5 30.12,90.71 29.7,90.29 27.14,90.29 27,90.44 27,90.67 27.12,90.79 28.36,90.79 28.69,91.12 28.69,92.08 Q1.2 28.38,92.82 C5.2
N$8
  Top 0.178: IC2.6 30.17,90.21 29.84,89.89 26.84,89.89 25.92,90.81 24.45,90.81 24.09,91.16 Q1.1 23.51,93.19 C4.2
N$9
  Top 0.178: J6.2 45.41,3.41 44.72,4.09 R11.1
N$11  (via drill 0.38 pad 0.7)
  Top 0.178: IC9.6 44.42,19.75 44.11,19.44 40.39,19.44 40.35,19.39 | 40.35,19.39 40.33,19.37 | 40.33,19.37 R25.2 | 40.35,19.39 40.35,20.3 C28.1 | 40.33,19.37 v40.3,19.34 | R21.1 40.33,23.26 v40.35,23.28 40.35,24.3 R23.1
  Bottom 0.178: v40.3,19.34 40.3,23.24 v40.35,23.28
N$12  (via drill 0.38 pad 0.7)
  Top 0.178: v45.36,99.34 45.09,99.34 44.89,99.14 44.89,99.24 44.55,99.24 R1.2
  Bottom 0.178: LED1.3 47.8,103.32 45.36,100.87 v45.36,99.34
N$13
  Top 0.178: IC2.47 C22.1
N$14  (via drill 0.38 pad 0.7)
  Top 0.178: IC9.2 53,18.48 53.56,17.91 57.51,17.91 57.9,18.3 R13.2 v57.9,20.34 C14.1 57.9,24.2 R15.1 | v57.7,5.04 57.53,5.2 R14.1
  Bottom 0.178: v57.9,20.34 57.9,5.25 v57.7,5.04
N$15  (via drill 0.38 pad 0.7)
  Top 0.178: IC5.6 22.57,19.75 22.5,19.69 | 22.5,19.69 v22.46,19.65 22.34,19.53 C36.1 | 22.5,19.69 22.5,20.48 R31.2 | R34.1 22.21,25.12 v22.27,25.06 22.27,24.42 R36.1
  Bottom 0.178: v22.46,19.65 22.46,24.86 v22.27,25.06
N$16  (via drill 0.38 pad 0.7)
  Top 0.381: C2.1 15.89,82.59 v14.34,82.59 13.67,81.92 v5.41,81.92 | v14.05,87.5 12.96,87.5 12.69,87.24 R2.1 | v5.41,75.9 5.04,75.53 IC1.3
  Bottom 0.381: v14.34,82.59 14.34,87.21 v14.05,87.5 | v5.41,81.92 v5.41,75.9
N$17
  Top 0.178: IC6.16 38.93,67.45 38.43,66.95 38.43,64.6 38.68,64.35 C35.1 43.16,64.35 C34.+
N$18
  Top 0.178: C40.- 52.36,61.57 R54.1 C49.1 53.03,66.14 R51.2
N$19
  Top 0.178: IC2.31 40.62,82.44 41.11,81.95 41.11,80.66 C16.1
N$20
  Top 0.178: R52.2 44.76,10.46 J6.1
N$21  (via drill 0.38 pad 0.7)
  Top 0.178: J8.2 36.01,2.85 37.52,1.33 v50.3,1.33 | v55.59,61.2 55.59,61.37 R54.2
  Bottom 0.178: v50.3,1.33 50.3,31.66 55.55,36.9 55.55,41.06 53.12,43.49 53.12,53.82 55.59,56.29 v55.59,61.2
N$22
  Top 0.178: R3.2 46.31,106.16 47.95,107.79 LED1.1
N$23  (via drill 0.38 pad 0.7)
  Top 0.178: R43.2 18.95,24.83 | 18.95,24.83 R38.2 | C33.- 36.83,61.57 v36.83,61.51 | v32.57,34.3 22.17,34.3 v21.58,34.89 | v19,24.83 18.95,24.83
  Bottom 0.178: v36.83,61.51 35.46,60.14 35.46,42.18 32.57,39.29 v32.57,34.3 | v21.58,34.89 21.24,34.56 21.24,27.07 v19,24.83
N$25  (via drill 0.38 pad 0.7)
  Top 0.178: IC8.2 17.19,18.48 C43.1 17.25,17.67 v17.28,17.64 | v16.49,20.85 17.14,20.85 R42.2 | R43.1 17.25,23.58 v16.04,24.78 16.04,25.14 R44.1
  Bottom 0.178: v17.28,17.64 16.49,18.43 v16.49,20.85 16.49,24.34 v16.04,24.78
N$27  (via drill 0.38 pad 0.7)
  Top 0.178: R4.2 9.93,103.16 v10.12,102.96
  Bottom 0.178: v10.12,102.96 10.48,103.32 LED2.3
N$28  (via drill 0.38 pad 0.7)
  Top 0.178: R42.1 C43.2 18.95,17.24 18.11,16.4 v17.25,16.4 13.89,16.4 IC8.1 | R56.2 17.17,4.95 v17.22,4.9
  Bottom 0.178: v17.22,4.9 17.25,4.93 v17.25,16.4
N$29
  Top 0.178: J10.2 14.93,4.37 R56.1
N$30  (via drill 0.38 pad 0.7)
  Top 0.178: R35.1 37.37,26.75 v37.51,26.6 | v35.06,29.84 35.23,29.67 C38.1 | v34.72,33.32 35.01,33.61 R32.2 35.67,33.87 36.15,34.35 IC7.6 | v34.76,36.23 35.75,36.23 R37.1
  Bottom 0.178: v37.51,26.6 35.62,28.49 35.62,29.28 v35.06,29.84 35.06,32.98 v34.72,33.32 34.72,33.23 34.76,33.19 v34.76,36.23
N$31  (via drill 0.38 pad 0.7)
  Top 0.178: R33.2 v2.01,24.76 R40.2 | v1.46,35.44 2.53,36.51 v28.37,36.51 | v30.03,60.31 30.14,60.31 30.14,60.96 C32.-
  Bottom 0.178: v2.01,24.76 2.01,34.89 v1.46,35.44 | v28.37,36.51 28.37,41.65 25.9,44.12 25.9,50.43 30.03,54.55 v30.03,60.31
N$32  (via drill 0.38 pad 0.7)
  Top 0.178: IC8.6 2.19,19.75 2.16,19.72 | 2.16,19.72 1.98,19.54 2.01,19.52 C42.1 1.88,18.29 v1.88,17.32 | 2.16,19.72 2.16,20.81 R41.2 | R39.1 1.96,8.6 v1.66,8.9 | v3.51,24.99 3.71,25.19 R40.1
  Bottom 0.178: v1.66,8.9 1.88,9.13 v1.88,17.32 1.88,23.36 v3.51,24.99
N$33  (via drill 0.38 pad 0.7)
  Top 0.178: R55.2 2.83,5.19 v2.82,5.2 | v3.7,17.59 3.7,18.41 C42.2 7.82,18.42 IC8.7 | v4.61,21 4.57,20.96 R41.1
  Bottom 0.178: v2.82,5.2 2.6,5.42 2.6,14.89 3.7,15.99 v3.7,17.59 3.7,20.09 v4.61,21
N$34
  Top 0.178: J9.2 4.77,4.3 R55.1
N$35
  Top 0.178: R5.2 14.93,106.2 13.82,107.32 LED2.1
N$37  (via drill 0.38 pad 0.7)
  Top 0.178: IC2.52 39.62,93.57 40.28,92.92 40.95,92.92 41.84,93.81 41.84,94.71 v43.44,96.31 | v44.79,104.26 45.68,104.26 R3.1
  Bottom 0.178: v43.44,96.31 43.24,96.51 43.24,100.39 44.79,101.94 v44.79,104.26
N$38
  Top 0.178: R50.1 24.29,10.31 J2.1
N$39
  Top 0.178: R53.2 34.36,10.22 J8.1
N$40  (via drill 0.38 pad 0.7)
  Top 0.178: IC2.8 31.44,89.26 30.56,89.26 30.39,89.44 v19.6,89.44 | v19.67,99.72 19.67,101.22 18.96,101.93 11.9,101.93 11.09,102.74 11.09,105.72 10.65,106.16 R4.1
  Bottom 0.178: v19.6,89.44 19.67,89.51 v19.67,99.72
N$41
  Top 0.178: IC6.25 41.39,73.3 41.73,72.96 41.73,72.39 41.89,72.22 42.2,72.22 42.38,72.41 42.38,73.03 42.69,73.35 43.56,73.35 Q3.2 45.33,72.77 45.92,72.18 C24.2
N$42
  Top 0.178: IC6.26 41.35,73.95 42.43,75.03 42.43,76.67 42.6,76.84 Q3.1 47.31,76.84 C23.2
N$43
  Top 0.178: IC2.53 39.12,93.49 40.11,92.51 41.03,92.51 42.4,93.88 42.4,93.95 44.2,95.75 R1.1
N$44  (via drill 0.38 pad 0.7)
  Top 0.178: IC2.51 40.12,96.49 39.26,97.35 v38.47,97.35 | v33.69,107.95 33.37,108.27 16.95,108.27 16.33,107.65 16.33,104.91 15.92,104.5 R5.1
  Bottom 0.178: v38.47,97.35 38.47,100.4 36.67,102.19 36.67,106.68 37.31,107.32 37.31,108.15 36.85,108.61 34.35,108.61 v33.69,107.95
N$45
  Top 0.178: R39.2 15.81,10.22 J10.1
N$46
  Top 0.178: SJ1.1 R44.2
N$47  (via drill 0.38 pad 0.7)
  Top 0.178: v6.1,25.9 8.21,25.9 SJ1.2
  Bottom 0.178: J9.1 5,11.1 7.09,13.19 7.09,22.02 6.1,23.01 v6.1,25.9
N$56  (via drill 0.38 pad 0.7)
  Top 0.508: L1.2 v17.94,100.65
  Bottom 0.508: v17.94,100.65 18.47,100.65 19.1,101.27 26.28,101.27 26.83,101.82 28.02,101.82 28.9,102.69 JP3.2 JP3.1
N$64  (via drill 0.38 pad 0.7)
  Top 0.508: v14.35,100.47 13.87,99.98 L2.2
  Bottom 0.508: JP3.9 JP3.10 18.03,104.14 v14.35,100.47
N$66  (via drill 0.38 pad 0.7)
  Top 0.178: Q2.B 26.15,80.45 v25.8,80.8 | v27.87,6.22 45.12,6.22 R11.2
  Bottom 0.178: v25.8,80.8 25.68,80.8 24.5,79.61 24.5,63.24 27.54,60.2 27.54,52.72 25.53,50.71 25.53,43.88 27.86,41.56 27.86,37.6 26.37,36.11 26.37,15.59 27.87,14.08 v27.87,6.22
Net_0  (via drill 0.38 pad 0.7)
  Top 0.178: U1.2 24.49,52.87 R59.1 21.39,53.6 v21.28,53.48
  Bottom 0.178: v21.28,53.48 R30.6
Net_1  (via drill 0.38 pad 0.7)
  Top 0.178: R58.1 35.72,53.56 34.38,52.22 U1.6 31.46,52.22 v30.93,52.76
  Bottom 0.178: v30.93,52.76 31.44,53.26 R10.6
Net_95  (via drill 0.38 pad 0.7)
  Top 0.381: D7.3 10.96,95.05 v11.34,94.66 | v15.88,99.03 15.88,99.41 L1.1
  Bottom 0.381: v11.34,94.66 15.71,99.03 v15.88,99.03
Net_96
  Top 0.381: L2.1 11.22,99.89 9.57,98.23 D7.4
Net_103  (via drill 0.38 pad 0.7)
  Top 0.178: U1.1 27.58,53.64 26.7,54.52 v15.56,54.52
  Bottom 0.178: v15.56,54.52 15.56,59.36 16.6,60.4 16.6,66.4 18.79,68.59 18.79,86.76 20.36,88.33 20.36,97.83 R30.5
Net_104  (via drill 0.38 pad 0.7)
  Top 0.178: U19.1 v45.54,53.52 | v48.1,101.76 42.87,101.76 v42.39,101.29
  Bottom 0.178: v45.54,53.52 45.41,53.66 45.41,87.97 48.1,90.67 v48.1,101.76 | v42.39,101.29 41.6,100.49 R29.5
Net_105  (via drill 0.38 pad 0.7)
  Top 0.178: U19.7 v50.8,52.87
  Bottom 0.178: v50.8,52.87 50.64,53.03 50.64,97.63 R28.5
Net_106  (via drill 0.38 pad 0.7)
  Top 0.178: R10.5 30.32,98.74 28.52,96.95 20.36,96.95 v18.89,98.42 | v14.74,55.25 15.98,55.25 16.36,54.88 29.84,54.88 31.85,52.87 U1.7
  Bottom 0.178: v18.89,98.42 18.35,97.88 18.35,68.74 16.15,66.53 16.15,60.54 14.74,59.13 v14.74,55.25
Net_109  (via drill 0.38 pad 0.7)
  Top 0.178: v41.54,53.22 41.76,53.44 R101.1 44.1,53.44 44.67,52.87 U19.2
  Bottom 0.178: v41.54,53.22 41.6,53.28 R29.6
Net_116
  Top 0.178: R28.6 51.76,57.26 52.82,56.19 54.44,56.19 56.36,54.28 R98.1 55.38,53.4 54.2,52.22 U19.6
NORMALIZATION_PROBE  (via drill 0.38 pad 0.7)
  Top 0.178: IC2.39 49.05,88.21 D3.3 57.95,87.87 v58.3,88.22 | v58.8,8.63 R57.1 56.66,8.18 56.04,7.55 46.42,7.55 | 46.42,7.55 36.5,7.55 36.06,7.99 R53.1 | 46.42,7.55 46.42,8.57 R52.1
  Bottom 0.178: v58.8,8.63 59.18,9.02 59.18,42.26 58.3,43.15 v58.3,88.22
POS-raw  (via drill 0.38 pad 0.7)
  Top 0.178: R35.2 v25.72,27.52 15.68,27.52 J5.2 | U1.3 25.53,52.22 v25.09,51.78
  Bottom 0.178: v25.09,51.78 25.09,43.61 27.44,41.27 27.44,37.91 25.72,36.19 v25.72,27.52
POSITION_ATT  (via drill 0.38 pad 0.7)
  Top 0.178: v9.94,58.3 9.86,58.22 IC4.15
  Bottom 0.178: R49.P$2 8.56,38.72 8.56,50.11 8.79,50.34 8.79,57.16 v9.94,58.3
POSITION_CV  (via drill 0.38 pad 0.7)
  Top 0.178: IC7.7 40.9,33.12 v39.37,33.12 39.37,33.08 38.11,33.08 | 38.11,33.08 37.89,33.08 R32.1 | v40.11,30.93 38.85,29.67 C38.2 | IC2.23 36.62,80.89 34.95,79.22 v33.82,79.22 | v31.49,32.92 33.63,32.92 33.94,32.61 37.64,32.61 38.11,33.08
  Bottom 0.178: v39.37,33.12 39.4,33.12 40.11,32.41 v40.11,30.93 | v33.82,79.22 33.82,79.07 30.86,76.11 30.86,64.6 35,60.46 35,42.84 31.49,39.33 v31.49,32.92
POSITION_POT
  Top 0.178: R30.2 28.9,57.53 28.24,56.87 16.77,56.87 15.31,58.32 12.29,58.32 11.81,57.85 IC4.12
RESET  (via drill 0.38 pad 0.7)
  Top 0.178: JP1.10 40.33,102.45 39.97,102.09 37.24,102.09 R6.1 35.27,103.12 v35.13,102.97 | IC2.7 v33.95,89.71
  Bottom 0.178: v33.95,89.71 33.95,94.05 35.13,95.23 v35.13,102.97
STRUM  (via drill 0.38 pad 0.7)
  Top 0.178: IC2.16 31.15,84.93 27.89,84.93 R8.1 28.03,84.4 v27.92,84.4 | v27.92,81.99 27.89,81.95 Q2.C
  Bottom 0.178: v27.92,84.4 v27.92,81.99
SW_MODE  (via drill 0.38 pad 0.7)
  Top 0.178: SW2.3 SW2.4 9.28,107.67 10.28,108.67 35.05,108.67 35.42,108.3 v35.42,106.77 | SW2.3 | v35.09,93.03 35.09,94.09 35.06,94.06 35.06,94.84 IC2.61
  Bottom 0.178: v35.42,106.77 35.34,106.69 36.04,105.98 36.04,102.34 35.54,101.84 35.54,94.75 35.09,94.3 v35.09,93.03
SW_POLYPHONY  (via drill 0.38 pad 0.7)
  Top 0.178: IC2.62 34.62,95.58 35.25,96.21 35.25,96.84 v33.34,98.75 | v33.24,101.75 40.93,101.75 41.57,102.38 52.05,102.38 52.01,102.34 52.23,102.34 52.23,103.24 SW1.4 SW1.3
  Bottom 0.178: v33.34,98.75 33.24,98.64 v33.24,101.75
V_OCT_CV  (via drill 0.38 pad 0.7)
  Top 0.254: IC2.15 30.63,85.71 30.38,85.46 29.31,85.46 29.31,85.83 v29.22,85.73 | v22.61,48.55 v57.53,48.55 | v58.58,17.21 56.56,17.21 56.43,17.21 | 56.43,17.21 IC9.1 | R13.1 v56.2,20.28 C14.2 | v56.2,16.98 56.43,17.21
  Bottom 0.254: v29.22,85.73 27.7,85.73 24.53,82.57 24.53,82.65 22.61,80.73 v22.61,48.55 | v57.53,48.55 57.53,43.13 58.58,42.07 v58.58,17.21 | v56.2,20.28 v56.2,16.98
VCC  (via drill 0.38 pad 0.7)
  Top 0.381: R2.2 9.47,91.32 10.01,91.87 11.09,91.87 14.29,95.07 C3.1 12.35,95.89 11.82,96.41 v6.68,96.41 5.5,97.59 D7.1 | v9.62,17.1 7.99,17.1 IC8.8 7.94,17.27 C39.1 | U19.8 52.84,53.52 51.17,55.2 34.72,55.2 33.38,53.86 U1.8 31.89,53.52 29.9,55.51 v16.67,55.51 | v14.45,48.74 13.97,48.26 v2.54,48.26
  Bottom 0.381: v6.68,96.41 6.68,95.89 3.33,92.54 3.33,66.22 2.62,65.5 2.62,48.26 | 2.62,48.26 2.62,37.08 7.8,31.9 7.8,23.19 9.62,21.37 v9.62,17.1 | v16.67,55.51 16.67,50.96 v14.45,48.74 | v2.54,48.26 2.62,48.26
VEE  (via drill 0.38 pad 0.7)
  Top 0.381: v2.38,67.1 20.99,67.1 22.06,66.03 C1.- 22.06,63.4 20.95,62.3 v18.03,62.3 | v2.38,94.65 2.41,94.62 2.41,95.05 D7.2 | v11.26,21.04 13.06,21.04 IC8.4 13.08,22.95 C45.2 | R12.1 v11.21,33.77 | U19.4 47.11,51.24 46.17,50.3 30.52,50.3 29.24,51.57 U1.4 26.37,51.57 24.88,50.08 17.57,50.08 v17.57,49.76
  Bottom 0.381: v2.38,67.1 v2.38,94.65 | v18.03,62.3 18.03,50.22 v17.57,49.76 15.83,48.02 15.83,37.54 11.79,33.5 | 11.79,33.5 11.26,32.96 v11.26,21.04 | v11.21,33.77 11.48,33.5 11.79,33.5

## Text on the board
Top: JM
tPlace: JP3 | R4 | R5 | JP1 | R7 | R6 | R3 | EITHER WAY | L2 | L1 | + | D7 | C3 | R1 | C17 | C4 | C5 | C18 | IC2 | C10 | Q1 | C22 | D3 | C41 | R2 | C44 | C2 | L3 | C6 | R8 | C9 | C7 | C11 | C20 | C16 | R17 | Q2 | R16 | C8 | C21 | C25 | C27 | C23 | IC6 | C24 | IC1 | C30 | BETA 01 | Q3 | C31 | R27 | R51 | C32 | C33 | C34 | C40 | C1 | C49 | C47 | POT MUX | R54 | C35 | C13 | IC4 | C12 | U1 | R58 | U19 | R98 | R59 | R101 | SLIDER LED DRIVERS | C46 | C48 | -10 Vref | R37 | R20 | R32 | R12 | C15 | R18 | IC3 | C37 | OUT | IC7 | C26 | C38 | R40 | R38 | R34 | R19 | R35 | R36 | R23 | R15 | SJ1 | C45 | R44 | R43 | R33 | C14 | R41 | IC8 | IC5 | R24 | R21 | R31 | IC9 | R42 | C29 | R13 | C43 | C28 | R25 | C42 | C36 | R26 | C50 | C39 | C19 | R39 | R50 | R53 | R52 | R57 | R55 | R56 | R11 | R14 | R22
bPlace: LED2 | LED1 | SW1 | SW2 | R9 | R46 | R30 | R10 | R28 | R29 | R45 | R49 | R48 | R47 | J5 | J4 | J3 | J1 | J9 | J10 | J2 | J8 | J6 | J7
tDocu: JP1 | JP3 | R4 | R5 | R7 | R3 | R6 | L2 | L1 | D7 | C3 | R1 | C5 | C10 | C4 | IC2 | C17 | C18 | C22 | Q1 | C41 | D3 | C44 | R2 | C2 | C9 | C7 | R8 | L3 | C20 | C6 | Q2 | C11 | R17 | IC1 | R16 | C8 | C16 | C21 | C25 | C27 | C23 | Q3 | C24 | C30 | IC6 | C31 | R27 | R51 | C35 | C49 | C47 | C1 | R54 | C32 | C33 | C34 | C40 | IC4 | C13 | C12 | R59 | U1 | R58 | R101 | U19 | R98 | C46 | C48 | R37 | R20 | IC3 | R18 | R12 | C15 | R32 | IC7 | C37 | C26 | C38 | R19 | R38 | R35 | R40 | R44 | R34 | SJ1 | R36 | R23 | C45 | R43 | R24 | R15 | R33 | R21 | C28 | C14 | R41 | R42 | R31 | R13 | C42 | C43 | C36 | C29 | IC8 | IC5 | R26 | R25 | IC9 | C19 | C39 | C50 | R39 | R50 | R53 | R52 | R57 | R55 | R56 | R11 | R14 | R22
bDocu: SW1 | LED2 | LED1 | SW2 | R9 | R30 | R10 | R29 | R28 | R46 | R49 | R48 | R47 | R45 | J5 | J4 | J3 | J1 | J9 | J10 | J2 | J8 | J6 | J7